# EAGLE board SMD_Breakout (EAGLE 7.2.0)
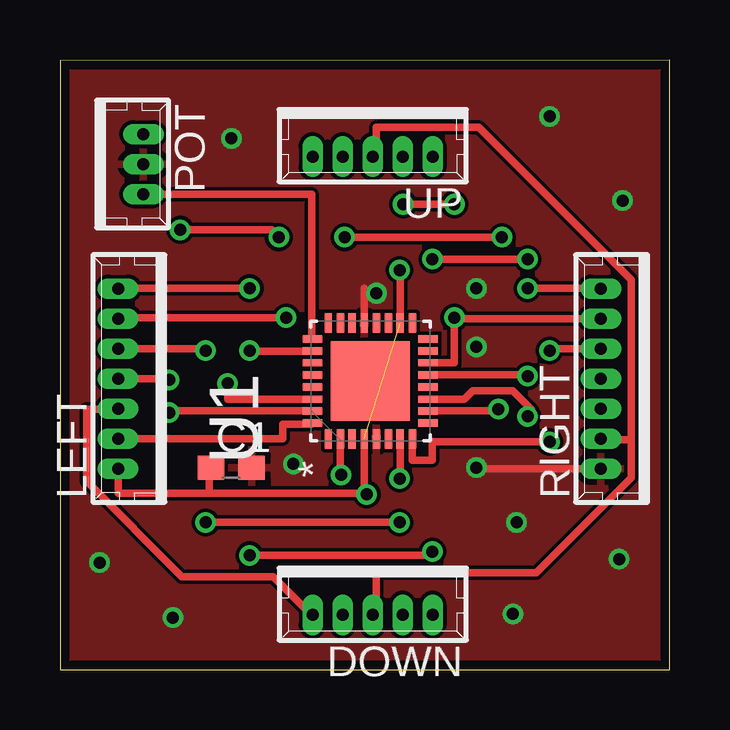
[diagram p0: board, top side]
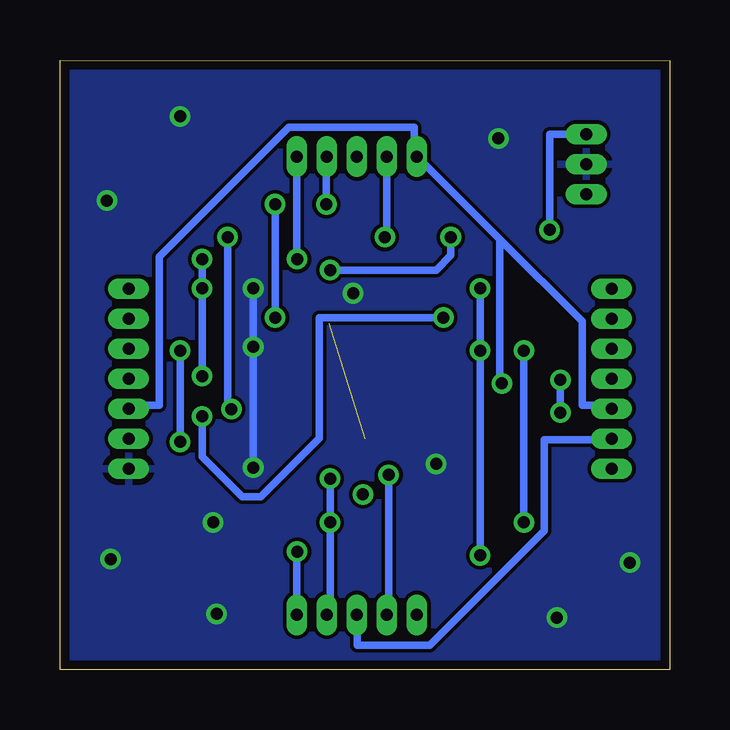
[diagram p1: board, bottom side, seen from below]

Size 25.4 x 25.42 mm. Coordinates in mm from the lower left corner, seen from the top.
Outline: 0,0 25.4,0 25.4,25.41 0,25.39 0,0
Copper layers (1*16): Top 0.0356mm / dielectric 1.5011mm / Bottom 0.0356mm
Design rules "LaenPCBOrder": minimum track width 6mil, minimum drill 13mil, track to track 6mil, track to pad 6mil, pad to pad 6mil, via to via 6mil, smd to smd 6mil, copper to edge 15mil, drill to drill 6mil, minimum pad ring 7mil, minimum via ring 7mil, stop-mask expansion 3mil, vias tented up to drill 0mil, thermal gap 10mil

## Footprints (pad centres in the part's own frame; a part is rotated, then mirrored left to right if it is on the bottom)
C0603 = smd 1.1 x 1: 1 -0.85,0; 2 0.85,0
53047-05 = drill 0.5 pad 0.698 long: 1 2.5,0.45; 2 1.25,0.45; 3 0,0.45; 4 -1.25,0.45; 5 -2.5,0.45
53047-07 = drill 0.5 pad 0.698 long: 1 3.75,0.45; 2 2.5,0.45; 3 1.25,0.45; 4 0,0.45; 5 -1.25,0.45; 6 -2.5,0.45; 7 -3.75,0.45
53047-03 = drill 0.5 pad 0.698 long: 1 1.25,0.45; 2 0,0.45; 3 -1.25,0.45
QFN50P500X500X100-32N = smd 0.813 x 0.305: 1 -2.413,1.753; 2 -2.413,1.245; 3 -2.413,0.762; 4 -2.413,0.254; 5 -2.413,-0.254; 6 -2.413,-0.762; 7 -2.413,-1.245; 8 -2.413,-1.753; 17 2.413,-1.753; 18 2.413,-1.245; 19 2.413,-0.762; 20 2.413,-0.254; 21 2.413,0.254; 22 2.413,0.762; 23 2.413,1.245; 24 2.413,1.753 | smd 0.305 x 0.813: 9 -1.753,-2.413; 10 -1.245,-2.413; 11 -0.762,-2.413; 12 -0.254,-2.413; 13 0.254,-2.413; 14 0.762,-2.413; 15 1.245,-2.413; 16 1.753,-2.413; 25 1.753,2.413; 26 1.245,2.413; 27 0.762,2.413; 28 0.254,2.413; 29 -0.254,2.413; 30 -0.762,2.413; 31 -1.245,2.413; 32 -1.753,2.413 | smd 3.302 x 3.302: 33 0,0

## Placement (x,y rotation side)
C1  [C0603]  7.14,8.43 0 top
DOWN  53047-05  [53047-05]  13.03,2.74 180 top
LEFT  53047-07  [53047-07]  2.87,12.14 90 top
POT  53047-03  [53047-03]  3.02,21.08 270 top
RIGHT  53047-07  [53047-07]  22.99,12.14 90 top
U1  ATTINY461A-SUATTINY461A-QFN  [QFN50P500X500X100-32N]  12.93,12.04 90 top
UP  53047-05  [53047-05]  13.03,21.84 180 top

## Library data of the parts
C1 = rcl
DOWN UP = con-molex; MF: MOLEX; MPN: 53047-0510; OC_FARNELL: 9732861; OC_NEWARK: 38C9901
LEFT RIGHT = con-molex; MPN: 53047-0710-C; OC_FARNELL: 9732870; OC_NEWARK: 11M0149
POT = con-molex; MPN: 530470310; OC_FARNELL: 9732853; OC_NEWARK: 14R5412
U1 = Atmel_By_element14_Batch_1-00

## Nets
CLK_IN: DOWN.4 LEFT.3 U1.7
CLK_OUT: RIGHT.2 U1.14 UP.4
DOWN: DOWN.2 U1.2
GND: C1.2 POT.2 RIGHT.7 U1.5 U1.21
LEFT: LEFT.4 U1.31
MDO: RIGHT.1 U1.13 UP.5
N$1: LEFT.2 U1.11
N$2: POT.1 U1.25
RIGHT: RIGHT.3 U1.8
SCL: DOWN.3 LEFT.6 RIGHT.6 U1.32 UP.3
SDA: DOWN.1 LEFT.5 RIGHT.5 U1.30 UP.1
SDI: DOWN.5 LEFT.1 U1.26
UP: U1.10 UP.2
VDD: C1.1 LEFT.7 POT.3 U1.4 U1.18

## Tracks (layer width: path | path; a pad name or v marks a point on that pad's centre or on a via)
CLK_IN  (via drill 0.5)
  Top 0.305: U1.7 14.17,7.98 v14.15,7.98 | LEFT.3 6.07,13.39 v6.07,13.31 | v6.07,6.15 v14.15,6.15
  Bottom 0.305: v14.15,7.98 v14.15,6.15 14.15,2.29 DOWN.4 | v6.07,13.31 v6.07,6.15
CLK_OUT  (via drill 0.5)
  Top 0.305: U1.14 16.43,12.8 16.43,14.64 | 16.43,14.64 RIGHT.2 | 16.43,14.64 v16.43,14.68 | v16.43,19.41 v14.3,19.41
  Bottom 0.305: v16.43,14.68 v16.43,19.41 | v14.3,19.41 14.3,21.39 UP.4
DOWN  (via drill 0.5)
  Top 0.305: U1.2 11.68,8.13 v11.71,8.13
  Bottom 0.305: v11.71,8.13 11.71,2.29 DOWN.2
GND  (via drill 0.5)
  Top 0.305: U1.21 12.68,15.9 | v17.35,8.43 17.35,8.39 RIGHT.7
  Bottom 0.305: v17.35,15.9 v17.35,13.46 v17.35,8.43
  other vias: 9.73,8.59 19.02,6.15 23.29,4.62 18.87,2.34 4.7,2.18 1.65,4.47 7.14,22.15 20.4,23.06 23.44,19.56 13.18,15.7
  pour Bottom: 0,0 25.43,0.18 25.37,25.45 0,25.3
  pour Top: 0,0 25.48,0.1 25.5,25.4 0,25.3
LEFT  (via drill 0.5)
  Top 0.305: LEFT.4 4.55,12.14 v4.55,12.09 | U1.31 4.55,10.79 v4.55,10.72
  Bottom 0.305: v4.55,12.09 v4.55,10.72
MDO  (via drill 0.5)
  Top 0.305: U1.13 19.48,12.29 v19.48,12.24 | v19.48,15.9 RIGHT.1 | v15.52,17.12 v19.48,17.12
  Bottom 0.305: v19.48,12.24 v19.48,15.9 v19.48,17.12 | UP.5 v15.53,17.12 v15.52,17.12
N$1  (via drill 0.5)
  Top 0.305: U1.11 16.84,11.28 17.2,11.63 18.87,11.63 19.63,10.87 19.48,10.72 v19.48,10.57 | v9.42,14.68 2.53,14.68 LEFT.2
  Bottom 0.305: v19.48,10.57 19.48,8.89 17.8,7.21 17.04,7.21 14.61,9.65 14.61,14.68 v9.42,14.68
N$2
  Top 0.305: U1.25 10.49,13.79 10.49,19.83 POT.1
N$3  (via drill 0.5)
  other vias: 12.78,7.32
RIGHT  (via drill 0.5)
  Top 0.305: U1.8 14.68,8.74 15.52,8.74 15.52,9.5 v20.4,9.5 | v20.4,13.31 20.4,13.39 RIGHT.3
  Bottom 0.305: v20.4,9.5 v20.4,13.31
SCL
  Top 0.305: U1.32 10.47,10.24 9.27,10.24 9.27,9.64 LEFT.6 2.53,9.76 | 23.81,9.6 23.81,8.01 19.84,4.04 13.17,4.04 13.17,2.3 DOWN.3 | 23.81,9.6 22.7,9.6 RIGHT.6 | 23.81,9.6 23.81,16.27 17.46,22.62 13.17,22.62 13.17,21.51 UP.3
  Bottom 0.305: LEFT.6 2.53,9.6 5.23,9.6 5.23,5.79 9.99,1.03 13.01,1.03 13.01,2.14 DOWN.3
SDA  (via drill 0.5)
  Top 0.305: DOWN.1 10.47,2.3 8.88,3.89 5.07,3.89 1.1,7.86 1.1,10.87 2.38,10.87 LEFT.5 | U1.30 6.99,11.28 v6.99,11.94
  Bottom 0.305: 7.07,17.95 10.47,21.35 UP.1 10.63,21.51 10.63,22.62 15.87,22.62 21.27,17.22 21.27,11.03 22.54,11.03 RIGHT.5 | 7.07,17.95 3.65,14.52 3.65,11.03 2.53,11.03 LEFT.5 | v6.99,11.94 7.07,11.94 7.07,17.95
SDI  (via drill 0.5)
  Top 0.305: U1.26 7.9,13.28 v7.9,13.31 | v7.9,15.9 LEFT.1 | v15.52,4.93 15.52,4.78 v7.9,4.78
  Bottom 0.305: v7.9,15.9 v7.9,13.31 v7.9,4.78 | DOWN.5 v15.53,4.93 v15.52,4.93
UP  (via drill 0.5)
  Top 0.305: U1.10 18.26,10.79 v18.26,10.87 | v18.41,18.03 v11.86,18.03
  Bottom 0.305: v18.26,10.87 18.41,10.87 v18.41,18.03 | v11.86,18.03 11.78,18.03 UP.2
VDD  (via drill 0.5)  (1 unrouted)
  Top 0.305: U1.4 12.68,7.37 6.22,7.37 | 6.29,8.39 C1.1 6.22,8.43 6.22,7.37 | U1.18 14.17,16.66 v14.15,16.66 | v9.12,18.03 8.81,18.34 v5,18.34 | LEFT.7 2.42,7.37 6.22,7.37
  Bottom 0.305: v14.15,16.66 9.73,16.66 9.12,17.27 v9.12,18.03 | v5,18.34 5,22.33 POT.3